# Altium PCB CSI2-TX2-XAVIER_Rev01.PcbDoc (part 1 of 2)
Units mm, origin at the board's own origin, x right, y up, seen from the top; angles counter-clockwise.
Board outline 75 x 25 mm, 4 copper layers (Layer1 Top, Layer2, Layer3, Layer4 Bottom), stack 1.62 mm thick; 77 components, 97 nets, 354 pads, 134 vias.
Unrouted connection lines stored in the file: 59.
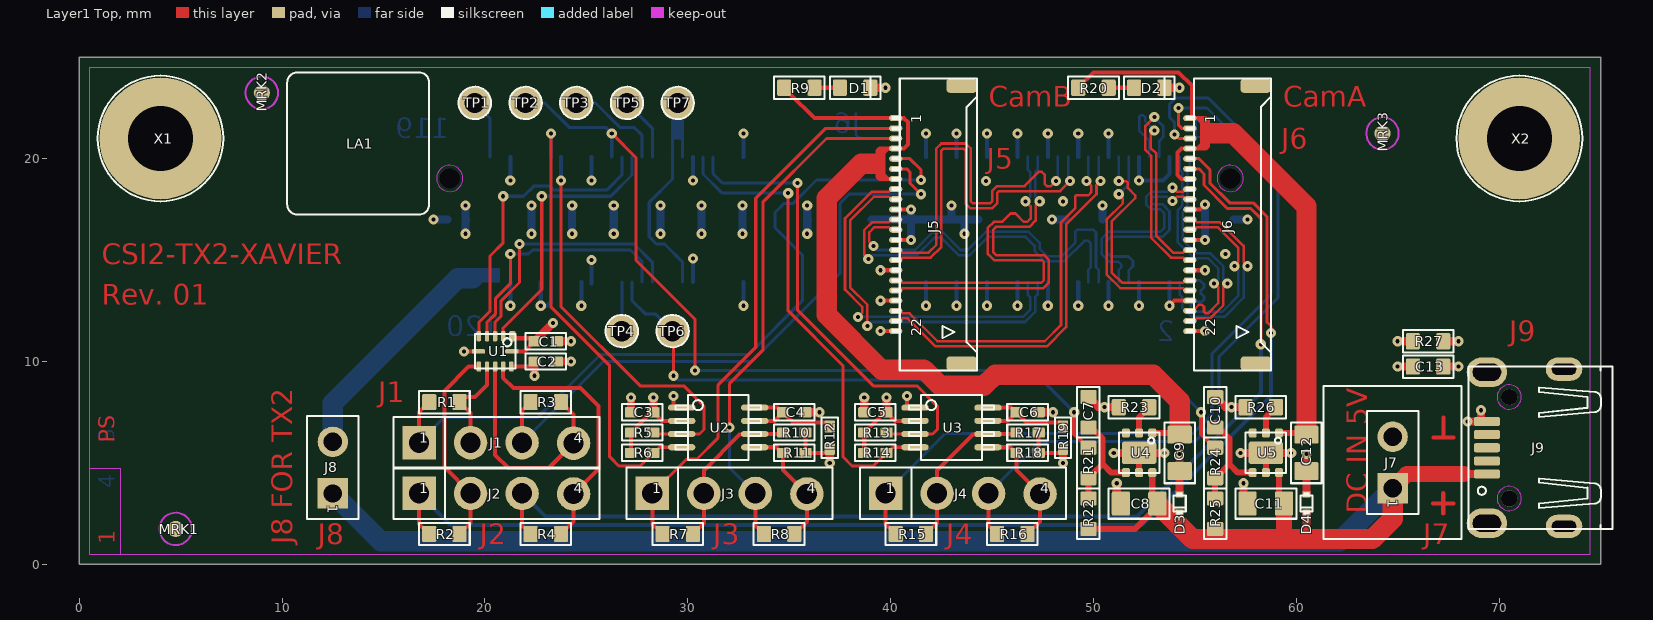
[diagram p0: Layer1 Top view]
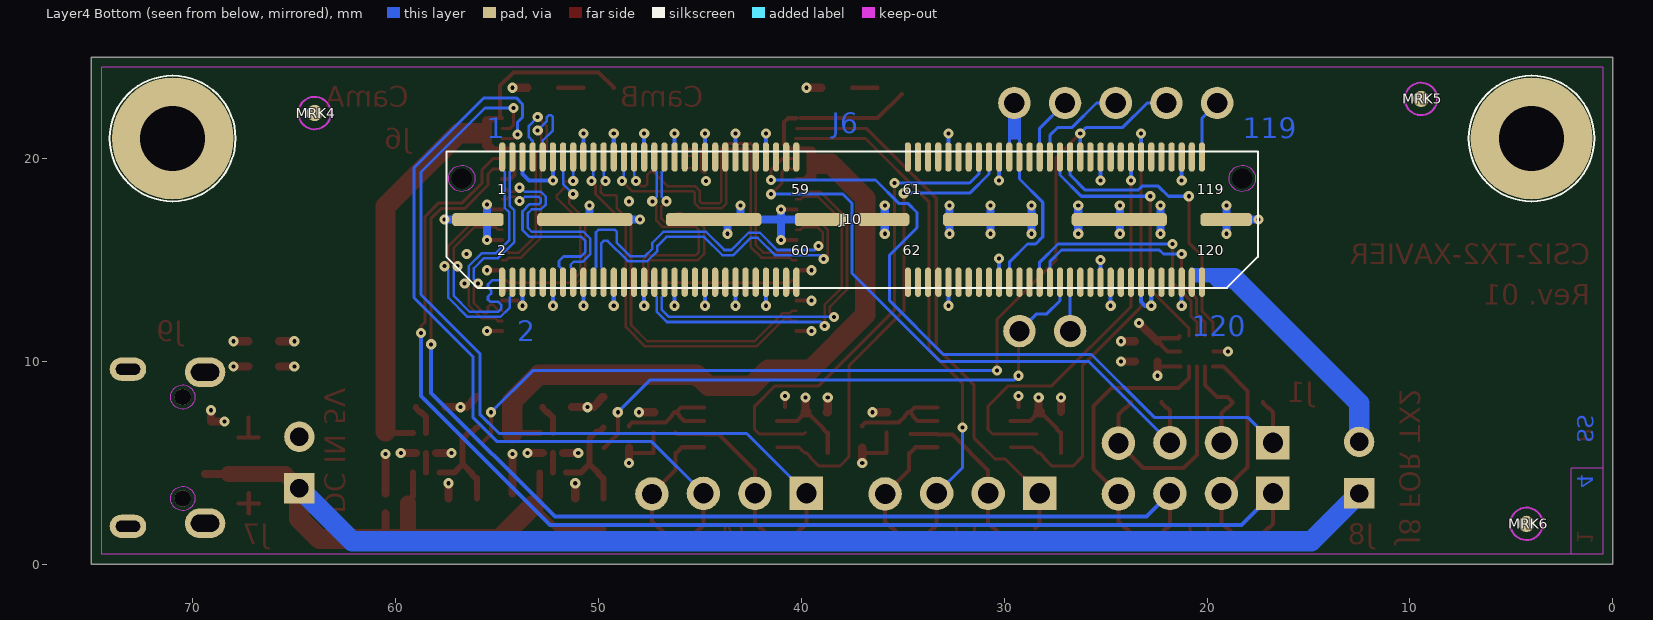
[diagram p1: Layer4 Bottom view, seen from below]
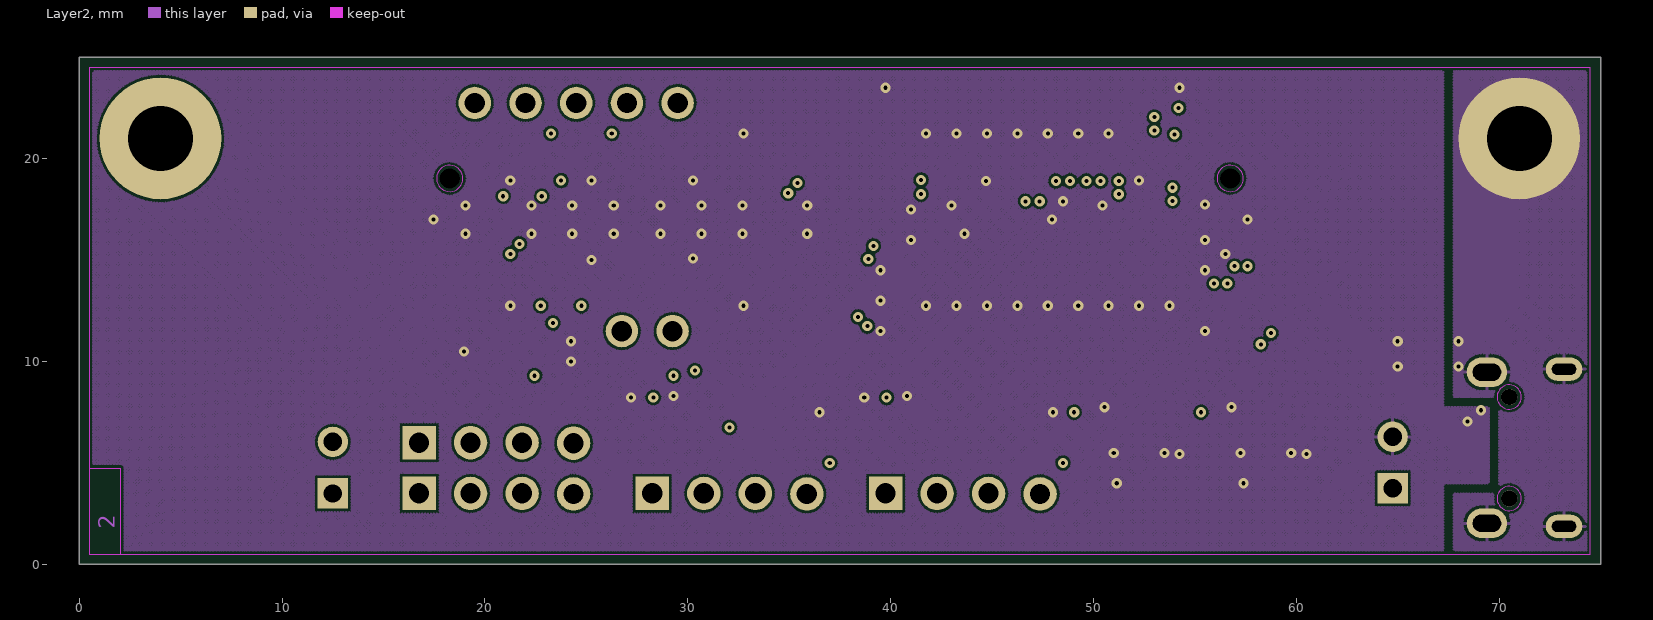
[diagram p2: Layer2]
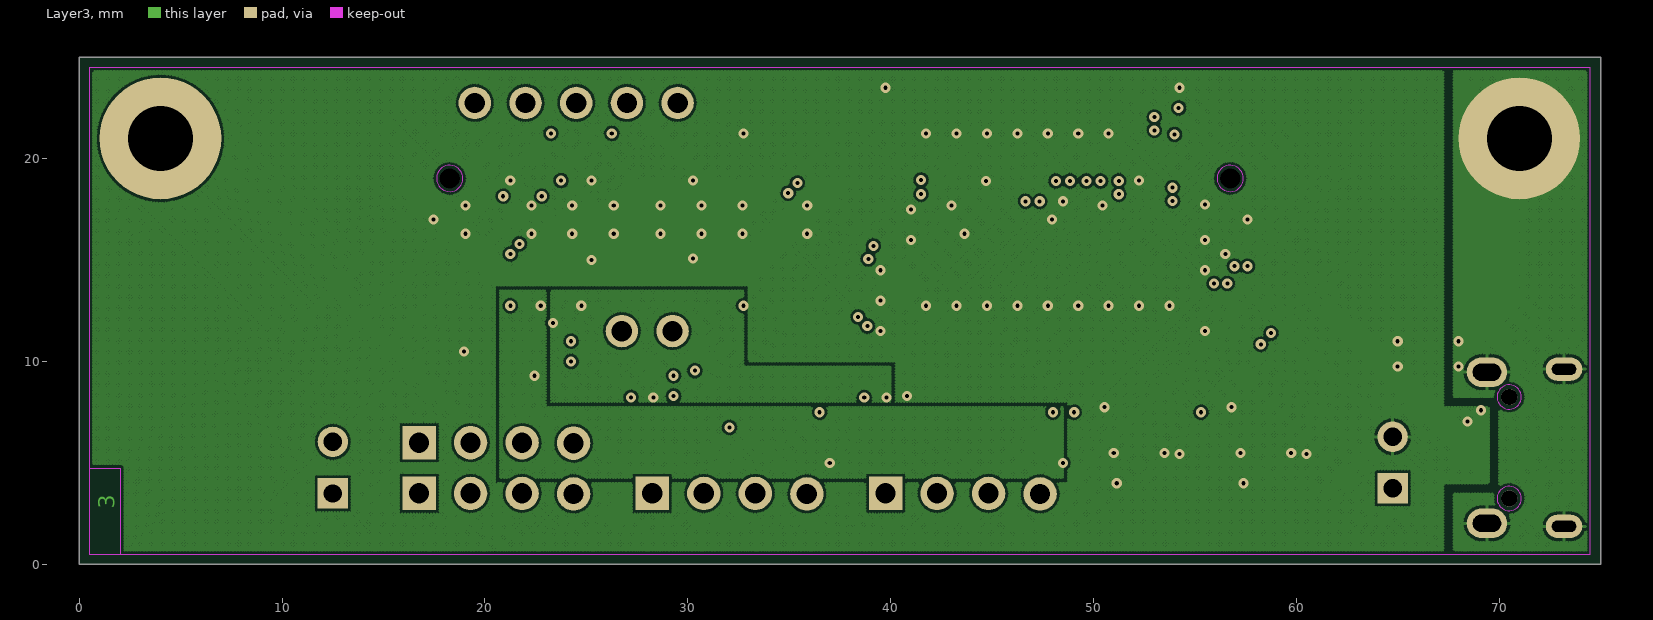
[diagram p3: Layer3]
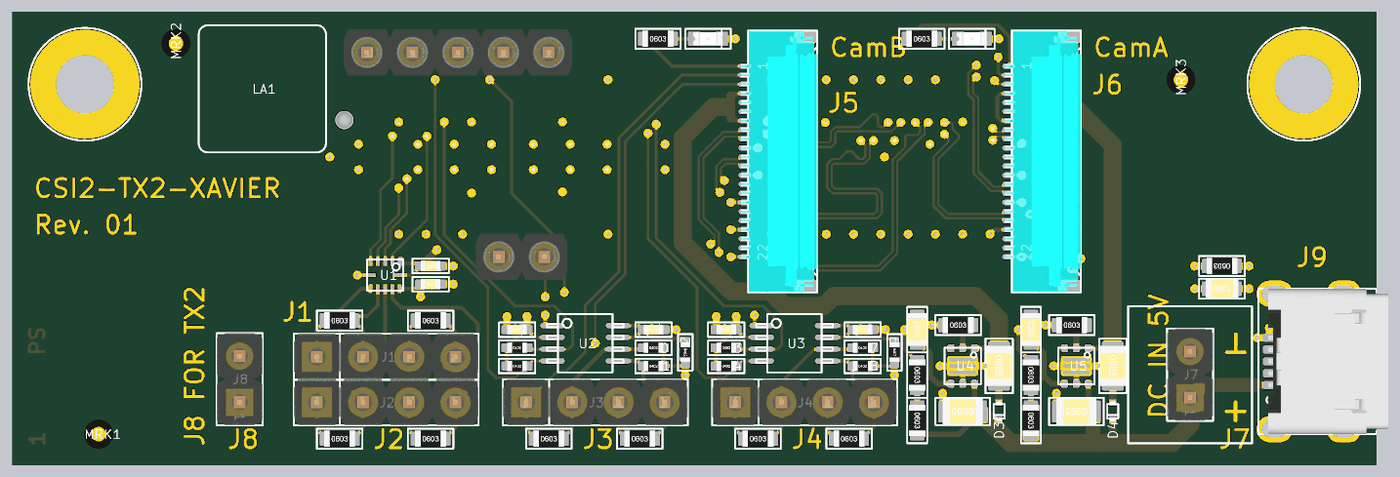
[diagram p5: 3D render of the assembled board from above, using the file's embedded part models]

## Layer stack, top to bottom
Top Solder: solder mask 0.025, Solder Resist, Dk 3.5
Layer1 Top: signal copper 0.035
Dielectric1: prepreg 0.14, PP-006, Dk 4.1
Layer2: signal copper 0.035
Dielectric2: core 1.2, Core-039, Dk 4.8
Layer3: signal copper 0.035
Dielectric3: prepreg 0.14, PP-006, Dk 4.1
Layer4 Bottom: signal copper 0.035
Bottom Solder: solder mask 0.025, Solder Resist, Dk 3.5

## Board outline
0,0 75,0 75,25 0,25

## Design rules (kind name [scope] priority, off if disabled: settings)
Clearance [All] p1: gap=0.125 ignorepadtopadclearanceinfootprint=FALSE
ComponentClearance [All] p1 off: gap=0.254 collisioncheckmode=3 verticalgap=0.254 showdistances=FALSE
DiffPairsRouting [All] p1: maxlimit=1 minlimit=0.125 mostfreqgap=0.125 toplayer_minwidth=0.125 toplayer_maxwidth=0.125 toplayer_prefwidth=0.125 midlayer1_minwidth=0.125 midlayer1_maxwidth=0.125 midlayer1_prefwidth=0.125 midlayer2_minwidth=0.125 midlayer2_maxwidth=0.125 midlayer2_prefwidth=0.125 bottomlayer_minwidth=0.125 bottomlayer_maxwidth=0.125 bottomlayer_prefwidth=0.125 maxuncoupledlength=12.7
FabricationTestPointUsage TestPointUsage [All] p1: valid=0 allowmultiple=FALSE
FabricationTestpoint Testpoint [All] p1: side=3 testpointundercomponent=TRUE minsize=1.016 maxsize=2.54 preferedsize=1.524 minholesize=0 maxholesize=1.016 preferedholesize=0.813 testpointgrid=0.025 allowsidetop=TRUE allowsidebottom=TRUE usegrid=TRUE gridtolerance=0
Height [All] p1 off: minheight=0 maxheight=25.4 prefheight=12.7
HoleSize [All] p1: absolutevalues=TRUE maxlimit=5 minlimit=0.025 maxpercent=80.000 minpercent=20.000
PlaneClearance [All] p1: clearance=0.3
PlaneConnect FreePads [(InPadClass('Free-Pads'))   or (isvia)] p1: planeconnectstyle=Direct reliefexpansion=0.508 reliefentries=4 reliefconductorwidth=0.254 reliefairgap=0.254
PlaneConnect [All] p2: planeconnectstyle=Relief reliefexpansion=0.2 reliefentries=4 reliefconductorwidth=0.2 reliefairgap=0.2
PolygonConnect VIA [isvia] p1: connectstyle=Direct reliefconductorwidth=0.2 reliefentries=4 polygonreliefangle="90 Angle" airgapwidth=0.254
PolygonConnect C-GND [HasFootprint('HOLE-3.2-6.0-DK')] p2: connectstyle=Direct reliefconductorwidth=0.2 reliefentries=4 polygonreliefangle="90 Angle" airgapwidth=0.254
PolygonConnect PolygonConnect_1 [All] p3: connectstyle=Relief reliefconductorwidth=0.15 reliefentries=4 polygonreliefangle="90 Angle" airgapwidth=0.15
RoutingVias [All] p1: holewidth=0.2 width=0.5 viastyle="Through Hole" minholewidth=0.2 minwidth=0.5 maxholewidth=0.2 maxwidth=0.5
SilkToSolderMaskClearance SilkscreenOverComponentPads [IsPad] p1: minsilkscreentomaskgap=0.254 clearancetoexposedcopper=TRUE
SolderMaskExpansion SolderMaskExpansion_VIA [(IsVia)] p1: expansion=-9
SolderMaskExpansion [All] p2: expansion=0.05
Width [All] p1: maxlimit=2 minlimit=0.1 preferedwidth=0.15
21 further rules are at their usual default settings.

## Classes and differential pairs
net class "100 Ohm": CSI0_CLK_N CSI0_CLK_P CSI0_D0_N CSI0_D0_P CSI0_D1_N CSI0_D1_P CSI1_D0_N CSI1_D0_P CSI1_D1_N CSI1_D1_P CSI2_CLK_N CSI2_CLK_P CSI2_D0_N CSI2_D0_P CSI2_D1_N CSI2_D1_P CSI3_D0_N CSI3_D0_P CSI3_D1_N CSI3_D1_P
differential pair CSI7_D1: +CSI7_D1_P -CSI7_D1_N
differential pair CSI7_D0: +CSI7_D0_P -CSI7_D0_N
differential pair CSI7_CLK: +CSI7_CLK_P -CSI7_CLK_N
differential pair CSI6_D1: +CSI6_D1_P -CSI6_D1_N
differential pair CSI6_D0: +CSI6_D0_P -CSI6_D0_N
differential pair CSI6_CLK: +CSI6_CLK_P -CSI6_CLK_N
differential pair CSI5_D1: +CSI5_D1_P -CSI5_D1_N
differential pair CSI5_D0: +CSI5_D0_P -CSI5_D0_N
differential pair CSI5_CLK: +CSI5_CLK_P -CSI5_CLK_N
differential pair CSI4_D1: +CSI4_D1_P -CSI4_D1_N
differential pair CSI4_D0: +CSI4_D0_P -CSI4_D0_N
differential pair CSI4_CLK: +CSI4_CLK_P -CSI4_CLK_N
differential pair CSI3_D1: +CSI3_D1_P -CSI3_D1_N
differential pair CSI3_D0: +CSI3_D0_P -CSI3_D0_N
differential pair CSI3_CLK: +CSI3_CLK_P -CSI3_CLK_N
differential pair CSI2_D1: +CSI2_D1_P -CSI2_D1_N
differential pair CSI2_D0: +CSI2_D0_P -CSI2_D0_N
differential pair CSI2_CLK: +CSI2_CLK_P -CSI2_CLK_N
differential pair CSI1_D1: +CSI1_D1_P -CSI1_D1_N
differential pair CSI1_D0: +CSI1_D0_P -CSI1_D0_N
differential pair CSI1_CLK: +CSI1_CLK_P -CSI1_CLK_N
differential pair CSI0_D1: +CSI0_D1_P -CSI0_D1_N
differential pair CSI0_D0: +CSI0_D0_P -CSI0_D0_N
differential pair CSI0_CLK: +CSI0_CLK_P -CSI0_CLK_N

## Components (designator, comment, footprint, x,y, rotation, side; value= is the part's Value field where it differs from the comment)
C1 "100n" C-0402_0.55 23,11 r0 top (schematic designator C11)
C2 "100n" C-0402_0.55 23,10 r0 top (schematic designator C12)
C3 "100n" C-0402_0.55 27.75,7.5 r180 top (schematic designator C9)
C4 "100p" C-0402_0.55 35.25,7.5 r0 top
C5 "100n" C-0402_0.55 39.25,7.5 r180 top (schematic designator C8)
C6 "100p" C-0402_0.55 46.75,7.5 r0 top (schematic designator C3)
C7 "100n" C-0603_1.0 49.75,7.5 r90 top (schematic designator C10)
C8 "10u" C-0805_1.4 52.25,3 r180 top (schematic designator C7)
C9 "10u" C-0805_1.4 54.25,5.5 r270 top (schematic designator C6)
C10 "100n" C-0603_1.0 56,7.5 r90 top (schematic designator C5)
C11 "10u" C-0805_1.4 58.5,3 r180 top (schematic designator C2)
C12 "10u" C-0805_1.4 60.5,5.5 r270 top (schematic designator C1)
C13 "NL" C-0603_1.0 66.5,9.75 r0 top
D1 "GREEN" D-0603-LED 38.25,23.5 r180 top (schematic designator D4)
D2 "GREEN" D-0603-LED 52.75,23.5 r180 top
D3 "ESD9B5.0ST5G" D-SOD923 54.25,3 r270 top
D4 "ESD9B5.0ST5G" D-SOD923 60.5,3 r270 top (schematic designator D1)
J1 "CON1x4" "CON 1x4 RM2.54" 16.75,6 r0 top (schematic designator J7)
J2 "CON1x4" "CON 1x4 RM2.54" 16.75,3.5 r0 top (schematic designator J5)
J3 "CON1x4" "CON 1x4 RM2.54" 28.25,3.5 r0 top (schematic designator J6)
J4 "CON1x4" "CON 1x4 RM2.54" 39.75,3.5 r0 top
J5 "CON FFC22_Inverted" "J-FH55-22S-0.5SH - Inverted Pins" 40.25,16.75 r90 top locked (schematic designator J11)
J6 "CON FFC22_Inverted" "J-FH55-22S-0.5SH - Inverted Pins" 54.75,16.75 r90 top locked (schematic designator J32)
J7 "CON1x2" "CON 1x2 RM2.54" 64.75,3.75 r90 top (schematic designator J2)
J8 "CON1x2" "CON 1x2 RM2.54" 12.5,3.5 r90 top (schematic designator J3)
J9 "USB 2.0 Typ B 90°" J-629105150521 69.4,5.75 r90 top (schematic designator J1)
J10 "QTH-060-01-L-D-A" J-QTH-060-XX-X-D-A 37.5,17 r180 bottom locked (schematic designator J40)
LA1 "LABEL 7x7mm" "PCB LABEL 7x7" 13.75,20.75 r180 top
MRK1 "Marker Single Layer" PCB_MARKER_PAD_TOP 4.75,1.75 r0 top (schematic designator MRK3)
MRK2 "Marker Single Layer" PCB_MARKER_PAD_TOP 9,23.25 r90 top (schematic designator MRK1)
MRK3 "Marker Single Layer" PCB_MARKER_PAD_TOP 64.25,21.25 r0 top (schematic designator MRK2)
MRK4 "Marker Single Layer" PCB_Marker_Pad_top 64,22.25 r0 bottom (schematic designator MRK5)
MRK5 "Marker Single Layer" PCB_MARKER_PAD_TOP 9.45,22.95 r180 bottom (schematic designator MRK4)
MRK6 "Marker Single Layer" PCB_Marker_Pad_top 4.25,2 r0 bottom
R1 "0R0" R-0603_0.6 18,8 r0 top (schematic designator R22)
R2 "0R0" R-0603_0.6 18,1.5 r0 top (schematic designator R18)
R3 "0R0" R-0603_0.6 23,8 r0 top (schematic designator R21)
R4 "0R0" R-0603_0.6 23,1.5 r0 top (schematic designator R17)
R5 "2k0" R-0402_0.4 27.75,6.5 r0 top (schematic designator R40)
R6 "2k0" R-0402_0.4 27.75,5.5 r0 top (schematic designator R39)
R7 "0R0" R-0603_0.6 29.5,1.5 r0 top (schematic designator R20)
R8 "0R0" R-0603_0.6 34.5,1.5 r0 top (schematic designator R19)
R9 "3k3" R-0603_0.6 35.5,23.5 r0 top (schematic designator R5)
R10 "2k0" R-0402_0.4 35.25,6.5 r0 top (schematic designator R13)
R11 "2k0" R-0402_0.4 35.25,5.5 r0 top (schematic designator R12)
R12 "200k" R-0402_0.4 37,6.25 r270 top (schematic designator R14)
R13 "2k0" R-0402_0.4 39.25,6.5 r0 top (schematic designator R38)
R14 "2k0" R-0402_0.4 39.25,5.5 r0 top (schematic designator R37)
R15 "0R0" R-0603_0.6 41,1.5 r0 top (schematic designator R16)
R16 "0R0" R-0603_0.6 46,1.5 r0 top (schematic designator R15)
R17 "2k0" R-0402_0.4 46.75,6.5 r0 top (schematic designator R10)
R18 "2k0" R-0402_0.4 46.75,5.5 r0 top (schematic designator R9)
R19 "200k" R-0402_0.4 48.5,6.25 r270 top (schematic designator R11)
R20 "3k3" R-0603_0.6 50,23.5 r0 top (schematic designator R1)
R21 "NL" R-0603_0.6 49.75,5 r270 top (schematic designator R8)
R22 "270k" R-0603_0.6 49.75,2.5 r270 top (schematic designator R6)
R23 "51k" R-0603_0.6 52,7.75 r0 top (schematic designator R7)
R24 "NL" R-0603_0.6 56,5 r270 top (schematic designator R4)
R25 "270k" R-0603_0.6 56,2.5 r270 top (schematic designator R2)
R26 "51k" R-0603_0.6 58.25,7.75 r0 top (schematic designator R3)
R27 "0R0" R-0603_0.6 66.5,11 r180 top (schematic designator R23)
T1 "PCB Text TOP" "PCB TEXTFIELD TOP 2" 5,-24 r0 top locked
T2 "PCB Text BOT" "PCB TEXTFIELD BOT 2" 5,-24 r180 bottom locked
TP1 "TP" TP_16_10 19.5,22.75 r180 top (schematic designator TP5)
TP2 "TP" TP_16_10 22,22.75 r180 top
TP3 "TP" TP_16_10 24.5,22.75 r180 top (schematic designator TP7)
TP4 "TP" TP_16_10 26.75,11.5 r180 top
TP5 "TP" TP_16_10 27,22.75 r180 top (schematic designator TP6)
TP6 "TP" TP_16_10 29.25,11.5 r180 top (schematic designator TP3)
TP7 "TP" TP_16_10 29.5,22.75 r180 top (schematic designator TP1)
U1 "NTB0104GU12,115" IC-XQFN12_1.7x2x0.5 20.5,10.5 r270 top (schematic designator U5)
U2 "PCA9306DCTR" IC-TSSOP8_3.15x4.25x1.3 31.5,6.75 r0 top (schematic designator U4)
U3 "PCA9306DCTR" IC-TSSOP8_3.15x4.25x1.3 43,6.75 r0 top
U4 "TPS25200DRVT" IC-DFN06_2.0x2.0x0.8 52.25,5.5 r180 top (schematic designator U2)
U5 "TPS25200DRVT" IC-DFN06_2.0x2.0x0.8 58.5,5.5 r180 top (schematic designator U1)
X1 "Hole" HOLE-3.2-6.0-DK 4,21 r0 top
X2 "Hole" HOLE-3.2-6.0-DK 71,21 r0 top

## Footprints (in the part's own frame and the unit in brackets; to place one, negate y for a bottom-side part, rotate by r counter-clockwise, add the part's x,y. Pads: shape width x height; smd on the part's side, far side on the other; paste and mask are expansions set on the pad)
C-0402_0.55 [mm]
  rrect20% 0.6x0.5 smd: 1(-0.55,0) 2(0.55,0)
  silkscreen extent -1,-0.4 1,0.4, body extent -0.53,-0.27 0.54,0.28, height 0.55
C-0603_1.0 [mm]
  rrect20% 0.7x0.8 smd: 1(-0.75,0) 2(0.75,0)
  silkscreen extent -1.25,-0.55 1.25,0.55, body extent -0.9,-0.5 0.9,0.5, height 0.99
C-0805_1.4 [mm]
  rrect20% 0.9x1.2 smd: 1(-0.9,0) 2(0.9,0)
  silkscreen extent -1.5,-0.75 1.5,0.75, body extent -1.1,-0.7 1.1,0.7, height 1.4
"CON 1x2 RM2.54" [mm]
  rect 1.5x1.5 hole 0.9: 1(0,0)
  round 1.5 hole 0.9: 2(2.54,0)
  silkscreen extent -1.27,-1.27 3.81,1.27, body extent -1.26,-1.27 3.82,1.27, height 8.57
"CON 1x4 RM2.54" [mm] "RM2.54 Connector 1x4"
  rect 1.65x1.65 hole 1: 1(0,0)
  round 1.65 hole 1: 2(2.54,0) 3(5.08,0) 4(7.62,-0.025)
  silkscreen extent -1.27,-1.27 8.89,1.27, body extent -1.28,-1.26 8.88,1.28, height 8.57
D-0603-LED [mm] "Osram Chip LED 0603"
  rrect20% 0.7x0.8 smd: A(0.75,0) K(-0.75,0)
  silkscreen extent -1.25,-0.55 1.25,0.55, body extent -0.82,-0.36 0.83,0.36, height 0.67
D-SOD923 [mm]
  rrect20% 0.3x0.4 smd: A(-0.45,0) K(0.45,0)
  silkscreen extent -0.5,-0.3 0.5,0.3, body extent -0.4,-0.3 0.4,0.3, height 0.4
HOLE-3.2-6.0-DK [mm]
  round 6 hole 3.2: 1(0,0)
  silkscreen extent -3.1,-3.1 3.1,3.1
IC-DFN06_2.0x2.0x0.8 [mm]
  rrect50% 0.4x0.45 smd paste-0.02: 1(-0.65,-0.975) 2(0,-0.975) 3(0.65,-0.975) 4(0.65,0.975) 5(0,0.975) 6(-0.65,0.975)
  rrect20% 1.7x1.1 smd paste-9: 7(0,0)
  silkscreen extent -1,-1 1,1, body extent -1,-1 1,1, height 0.85
IC-TSSOP8_3.15x4.25x1.3 [mm]
  oval 1.35x0.3 smd: 1(-1.8,0.975) 2(-1.8,0.325) 3(-1.8,-0.325) 4(-1.8,-0.975) 5(1.8,-0.975) 6(1.8,-0.325) 7(1.8,0.325) 8(1.8,0.975)
  silkscreen extent -2.1,-1.6 2.1,1.6, body extent -1.5,-1.6 1.5,1.6, height 1.35
IC-XQFN12_1.7x2x0.5 [mm]
  rrect50% 0.5x0.32 smd paste-0.025 mask+0.05: 1(-0.75,0.85)
  rrect50% 0.5x0.22 smd paste-0.025 mask+0.05: 2(-0.75,0.4) 3(-0.75,0) 4(-0.75,-0.4) 5(-0.75,-0.8) 7(0.75,-0.8) 8(0.75,-0.4) 9(0.75,0) 10(0.75,0.4) 11(0.75,0.8)
  rrect50% 0.22x0.65 smd paste-0.02 mask+0.05: 6(0,-0.825)
  rrect50% 0.22x0.65 smd paste-0.025 mask+0.05: 12(0,0.825)
  silkscreen extent -0.85,-1 0.85,1
J-629105150521 [mm]
  rrect50% 0.45x1.3 smd: 1(-1.3,0) 2(-0.65,0) 3(0,0) 4(0.65,0) 5(1.3,0)
  oval 1.15x1.8 hole 0.55 slot 1.2 at 90 deg: 6(-3.875,-3.8) 9(3.875,-3.8)
  oval 1.45x2 hole 0.85 slot 1.4 at 90 deg: 7(-3.725,0) 8(3.725,0)
  round 0.8 hole 0.8 unplated: ""(-2.5,-1.1) ""(2.5,-1.1)
  Keep-Out Layer circle w0.025: c2.5,-1.1 r0.6
  Keep-Out Layer circle w0.025: c-2.5,-1.1 r0.6
  silkscreen extent -4,-6.2 4,0.9, body extent -4,-6.25 4,0.35, height 2.67
"J-FH55-22S-0.5SH - Inverted Pins" [mm]
  oval 0.3x0.65 smd: 1(5.25,0) 2(4.75,0) 3(4.25,0) 4(3.75,0) 5(3.25,0) 6(2.75,0) 7(2.25,0) 8(1.75,0) 9(1.25,0) 10(0.75,0) 11(0.25,0) 12(-0.25,0) 13(-0.75,0) 14(-1.25,0) 15(-1.75,0) 16(-2.25,0) 17(-2.75,0) 18(-3.25,0) 19(-3.75,0) 20(-4.25,0) 21(-4.75,0) 22(-5.25,0)
  rrect50% 0.7x1.5 smd: 23(-6.85,-3.25) 24(6.85,-3.25)
  silkscreen extent -7.2,-4 7.2,0.15, body extent -7.2,-4.05 7.2,0.2, height 1.46
J-QTH-060-XX-X-D-A [mm]
  oval 0.305x1.45 smd mask+0.05: 1(-17.25,3.086) 2(-17.25,-3.086) 3(-16.75,3.086) 4(-16.75,-3.086) 5(-16.25,3.086) 6(-16.25,-3.086) 7(-15.75,3.086) 8(-15.75,-3.086) 9(-15.25,3.086) 10(-15.25,-3.086) 11(-14.75,3.086) 12(-14.75,-3.086) 13(-14.25,3.086) 14(-14.25,-3.086) 15(-13.75,3.086) 16(-13.75,-3.086) 17(-13.25,3.086) 18(-13.25,-3.086) 19(-12.75,3.086) 20(-12.75,-3.086) 21(-12.25,3.086) 22(-12.25,-3.086) 23(-11.75,3.086) 24(-11.75,-3.086) 25(-11.25,3.086) 26(-11.25,-3.086) 27(-10.75,3.086) 28(-10.75,-3.086) 29(-10.25,3.086) 30(-10.25,-3.086) 31(-9.75,3.086) 32(-9.75,-3.086) 33(-9.25,3.086) 34(-9.25,-3.086) 35(-8.75,3.086) 36(-8.75,-3.086) 37(-8.25,3.086) 38(-8.25,-3.086) 39(-7.75,3.086) 40(-7.75,-3.086) 41(-7.25,3.086) 42(-7.25,-3.086) 43(-6.75,3.086) 44(-6.75,-3.086) 45(-6.25,3.086) 46(-6.25,-3.086) 47(-5.75,3.086) 48(-5.75,-3.086) 49(-5.25,3.086) 50(-5.25,-3.086) 51(-4.75,3.086) 52(-4.75,-3.086) 53(-4.25,3.086) 54(-4.25,-3.086) 55(-3.75,3.086) 56(-3.75,-3.086) 57(-3.25,3.086) 58(-3.25,-3.086) 59(-2.75,3.086) 60(-2.75,-3.086) 61(2.75,3.086) 62(2.75,-3.086) 63(3.25,3.086) 64(3.25,-3.086) 65(3.75,3.086) 66(3.75,-3.086) 67(4.25,3.086) 68(4.25,-3.086) 69(4.75,3.086) 70(4.75,-3.086) 71(5.25,3.086) 72(5.25,-3.086) 73(5.75,3.086) 74(5.75,-3.086) 75(6.25,3.086) 76(6.25,-3.086) 77(6.75,3.086) 78(6.75,-3.086) 79(7.25,3.086) 80(7.25,-3.086) 81(7.75,3.086) 82(7.75,-3.086) 83(8.25,3.086) 84(8.25,-3.086) 85(8.75,3.086) 86(8.75,-3.086) 87(9.25,3.086) 88(9.25,-3.086) 89(9.75,3.086) 90(9.75,-3.086) 91(10.25,3.086) 92(10.25,-3.086) 93(10.75,3.086) 94(10.75,-3.086) 95(11.25,3.086) 96(11.25,-3.086) 97(11.75,3.086) 98(11.75,-3.086) 99(12.25,3.086) 100(12.25,-3.086) 101(12.75,3.086) 102(12.75,-3.086) 103(13.25,3.086) 104(13.25,-3.086) 105(13.75,3.086) 106(13.75,-3.086) 107(14.25,3.086) 108(14.25,-3.086) 109(14.75,3.086) 110(14.75,-3.086) 111(15.25,3.086) 112(15.25,-3.086) 113(15.75,3.086) 114(15.75,-3.086) 115(16.25,3.086) 116(16.25,-3.086) 117(16.75,3.086) 118(16.75,-3.086) 119(17.25,3.086) 120(17.25,-3.086)
  rrect50% 2.54x0.64 smd mask+0.05: 121(-18.445,0) 124(-1.555,0) 125(1.555,0) 128(18.445,0)
  rrect50% 4.7x0.64 smd mask+0.05: 122(-13.175,0) 123(-6.825,0) 126(6.825,0) 127(13.175,0)
  round 0 hole 1 unplated mask+0.55: 129(-19.24,2.03) 130(19.24,2.03)
  Keep-Out Layer circle w0.025: c19.24,2.03 r0.65
  Keep-Out Layer circle w0.025: c-19.24,2.03 r0.65
  silkscreen extent -20,-3.36 20,3.36, body extent -20,-3.56 20,3.56, height 4.31
"PCB LABEL 7x7" [mm]
  silkscreen extent -3.5,-3.5 3.5,3.5, body extent -3.5,-3.5 3.5,3.5, height 0.1
"PCB TEXTFIELD BOT 2" [mm]
"PCB TEXTFIELD TOP 2" [mm]
PCB_MARKER_PAD_TOP [mm] "PCB Marker with Pad for X-/Y-Coordinates (Single Layer)"
  round 0.8 smd paste-999 mask+0.4: 1(0,0)
  Layer1 Top keep-out circle w0.1: c0,0 r0.8
PCB_Marker_Pad_top [mm] "PCB Marker with Pad for X-/Y-Coordinates (Single Layer)"
  round 0.8 smd paste-999 mask+0.4: 1(0,0)
  Layer1 Top keep-out circle w0.1: c0,0 r0.8
R-0402_0.4 [mm]
  rrect20% 0.6x0.5 smd: 1(-0.55,0) 2(0.55,0)
  silkscreen extent -1,-0.4 1,0.4, body extent -0.53,-0.27 0.54,0.28, height 0.39
R-0603_0.6 [mm]
  rrect20% 0.7x0.8 smd: 1(-0.75,0) 2(0.75,0)
  silkscreen extent -1.25,-0.55 1.25,0.55, body extent -0.85,-0.45 0.85,0.45, height 0.59
TP_16_10 [mm] "Testpoint: Pad=1,6mm; Hole=1,0mm"
  round 1.6 hole 1: 1(0,0)
  silkscreen extent -0.8,-0.8 0.8,0.8, body extent -1.27,-1.27 1.27,1.27, height 8.57

## Part data
C1 C2 C3 C5: library part "C 100N 10% 16V X7R 402", "Capacitor Ceramic SMD/0402/16V/X7R/10%", Dielectric=X7R, KHK Part Number=K8340114, Manufacturer=several, Tolerance=10%, Voltage=16V, Manufacturer Part Number=several
C4 C6: library part "C 100P 50V X7R 0402", "Capacitor Ceramic SMD/0402/50V/X7R/10%", Dielectric=X7R, KHK Part Number=K8340145, Manufacturer=several, Tolerance=10%, Voltage=50V, Manufacturer Part Number=several
C7 C10: library part "C 100N 50V X7R 0603", "Capacitor Ceramic SMD/0603/50V/X7R/10%", Dielectric=X7R, KHK Part Number=K8340023, Manufacturer=several, Tolerance=10%, Voltage=50V, Manufacturer Part Number=several
C8 C9 C11 C12: library part "C 10U 16V X5R 0805", "Capacitor Ceramic SMD/0805/16V/X5R/10%", Dielectric=X5R, KHK Part Number=K8340151, Manufacturer=several, Tolerance=10%, Voltage=16V, Manufacturer Part Number=several
C13: library part "C X 0603", "Capacitor Ceramic SMD/0603/50V/X7R/10%", Dielectric=X7R, Manufacturer=several, Tolerance=10%, Voltage=50V, Manufacturer Part Number=several
D1 D2: library part "D LED 0603 green", "Chip LED green 430mcd", Color=green, Current=20mA, KHK Part Number=8172, Manufacturer=Würth, Manufacturer Part Number=150060GS75000
D3 D4: library part "D ESD9B5.0ST5G", "DIODE TVS; 400W; 5.8-7.8V; BIDIRECT", KHK Part Number=7250, Manufacturer="ON Semiconductor", Manufacturer Part Number=ESD9B5.0ST5G
J1 J2 J3 J4: library part "CON 1x4 2.54", "Stiftleiste; 1x4; 2.54mm; gerade", KHK Part Number=K7600564, Manufacturer=Harwin, Manufacturer Part Number="M20-999 0445"
J5 J6: library part "CON FFC22_FH55-22S-0.5SH_Inverted", "FFC Connector 0.5mm shielded", KHK Part Number=10357, Manufacturer=Hirose, Manufacturer Part Number=FH55-22S-0.5SH
J7 J8: library part "CON 1x2 2.54", "Stiftleiste; 1x2; 2.54mm; gerade", KHK Part Number=K7600582, Manufacturer="fischer elektronik", Manufacturer Part Number="SL 11 124 2 G"
J9: library part "CON USB 2.0 Typ B 90°", "Micro USB 2.0 Typ B 90°", KHK Part Number=14360, Manufacturer=WE, Manufacturer Part Number="629 105 150 521"
J10: library part "CON QTH-060-01-L-D-A", "120pin B2B Header 0.5 pitch 10.27mm Height", KHK Part Number=10657, Manufacturer=SamTec, Manufacturer Part Number=QTH-060-01-L-D-A
LA1: library part "PCB LABEL 7x7", Manufacturer=several, Manufacturer Part Number=several
MRK1 MRK2 MRK3 MRK4 MRK5 MRK6: library part "PCB Marker Pad Single Layer", "Position Marker for PCBs"
R1 R2 R3 R4 R27: library part "R 0R0 1% 0603", "Standard Resistor SMD/0603/1%/100mW/TK200", KHK Part Number=K8250041, Manufacturer=several, Tolerance=1%, Manufacturer Part Number=several
R5 R6 R10 R11 R13 R14 R17 R18: library part "R 2k0 1% 0402", "Standard Resistor SMD/0402/1%/63mW/TK100", KHK Part Number=K8250311, Manufacturer=several, Temperature Coefficient=TK100, Tolerance=1%, Manufacturer Part Number=several
R7 R8 R15 R16: library part "R 0R0 1% 0603", "Standard Resistor SMD/0603/1%/100mW/TK100", KHK Part Number=K8250041, Manufacturer=several, Tolerance=1%, Manufacturer Part Number=several
R9 R20: library part "R 3K3 1% 0603", "Standard Resistor SMD/0603/1%/100mW/TK100", KHK Part Number=K8250070, Manufacturer=several, Tolerance=1%, Manufacturer Part Number=several
R12 R19: library part "R 200K 1% 0402", "Standard Resistor SMD/0402/1%/63mW/TK100", KHK Part Number=K8250280, Manufacturer=several, Temperature Coefficient=TK100, Tolerance=1%, Manufacturer Part Number=several
R21 R24: library part "R X 0603", "Standard Resistor SMD/0603/1%/100mW/TK200", Temperature Coefficient=TK100, Tolerance=1%
R22 R25: library part "R 270K 1% 0603", "Standard Resistor SMD/0603/1%/100mW/TK100", KHK Part Number=K8250170, Manufacturer=several, Temperature Coefficient=na, Tolerance=1%, Manufacturer Part Number=several
R23 R26: library part "R 51K 1% 0603", "Standard Resistor SMD/0603/1%/100mW/TK100", KHK Part Number=K8250156, Manufacturer=several, Tolerance=1%, Manufacturer Part Number=several
T1: library part "PCB TEXT FIELD TOP", "PCB Textfield TOP"
T2: library part "PCB TEXT FIELD BOT", "PCB Textfield BOT"
TP1 TP2 TP3 TP4 TP5 TP6 TP7: library part TP_16_10, "Testpoint: Pad=1,6mm; Hole=1,0mm"
U1: library part "IC NTB0104GU12,115", "IC/LOGIC/Levelshifter;Auto-Dir;Bidirectional;Push-Pull;-40-+125°C/", KHK Part Number=14383, Manufacturer=NXP, Manufacturer Part Number=NTB0104GU12,115
U2 U3: library part "IC PCA9306DCTR", "IC/LOGIC/LEVELSHIFTER;I2C;AUTO-DIR;1V2-5V/SSOP-8/4.25x3.15x1.3mm", KHK Part Number=9555, Manufacturer=TI, Manufacturer Part Number=PCA9306DCTR
U4 U5: library part "IC  TPS25200DRVT", "IC/PWR/LOADSW;2V5-6V5;2A5;0R099/6-WDFN/2x2x0.8mm", KHK Part Number=14277, Manufacturer="Texas Instruments", I max=2.5A, Manufacturer Part Number=TPS25200DRVT, Vin=2.5V-6.5V
X1 X2: library part "PCB HOLE M3-6-DK", "HOLE M3"

## Via types
v1: diameter 0.5, hole 0.2, Layer1 Top to Layer4 Bottom, 134 vias

## Nets (pads, with @x,y where several pads share a name; then routed paths per layer and width w, separated by ;. In a path a pad name is that pad's centre, name@x,y a point inside that pad or via, vN(x,y) a via of type N, cw(c..) or ccw(c..) an arc to the next point about the centre after c; other vN are vias at no path point)
C-GND: C13.2 J9.6 J9.7 J9.8 J9.9 R27.1 X2.1 | length 1.5
  Layer1 Top w0.4: C13.2@67.25,9.75 v1(68,9.75) ; R27.1@67.25,11 v1(68,11)
CAM0_MCLK02: J10.91 U1.2 | length 13.5
  Layer1 Top w0.15: U1.2@20.9,11.25 20.9,11.65 22.8,13.55 v1(22.8,18.15)
  Layer4 Bottom w0.15: v1(22.8,18.15) 26.2,18.15 27.25,19.2 J10.91@27.25,20.086
CAM0_MCLK02_3V3: J2.4 R4.2 U1.10 | length 12.9
  Layer1 Top w0.2: U1.10@20.9,9.75 20.9,9.2 21.4,8.7 24.7,8.7 25.6,7.8 25.6,4.705 J2.4@24.37,3.475 24.37,2.12 24.05,1.8 24,1.8 23.75,1.55 R4.2@23.75,1.5
CAM0_PWDN: J10.93 U1.5 | length 14.7
  Layer1 Top w0.15: U1.5@19.7,11.25 19.7,11.928 20.25,12.478 20.25,15.2 20.9,15.85 v1(20.9,18.15)
  Layer4 Bottom w0.15: v1(20.9,18.15) 21.9,18.15 22.4,18.65 23.2,18.65 23.4,18.45 26,18.45 26.75,19.2 J10.93@26.75,20.086
CAM0_PWDN_3V3: J2.2 R2.2 U1.7 | length 10
  Layer1 Top w0.2: R2.2@18.75,1.5 18.75,1.55 19,1.8 19.05,1.8 19.29,2.04 J2.2@19.29,3.5 18,4.79 18,8.55 19.2,9.75 U1.7@19.7,9.75
CAM0_RST: J10.95 R24.1 TP2.1 | length 47.1
  Layer1 Top w0.15: v1(26.25,21.25) 27.45,20.05 27.45,15 30.35,12.1 v1(30.35,9.55)
  Layer1 Top w0.2: v1(55.3,7.5) 55.3,6.423 R24.1@55.7,6.023
  Layer4 Bottom w0.15: TP2.1@22,22.75 22.95,22.75 24.15,21.55 25.95,21.55 v1(26.25,21.25) J10.95@26.25,20.086 ; v1@30.2,9.65 30.3,9.55 v1(30.35,9.55) 53.25,9.55 v1(55.3,7.5)
CAM1_MCLK03: J10.88 U1.3 | length 13
  Layer1 Top w0.15: U1.3@20.5,11.25 20.5,11.95 20.8,12.25 20.8,13 21.7,13.9 v1(21.7,15.8)
  Layer4 Bottom w0.15: v1(21.7,15.8) 27.35,15.8 28.25,14.9 J10.88@28.25,13.914
CAM1_MCLK03_3V3: J1.4 R3.2 U1.9 | length 11.3
  Layer1 Top w0.2: U1.9@20.5,9.75 20.5,5.4 21.15,4.75 23.145,4.75 J1.4@24.37,5.975 24.37,7.38 24.05,7.7 24,7.7 23.75,7.95 R3.2@23.75,8
CAM2_MCLK04: J10.94 TP4.1 | length 2.4
  Layer4 Bottom w0.15: TP4.1@26.75,11.5 J10.94@26.75,13.914
CSI0_CLK_N: J6.14 J10.9 | length 10.8
  Layer1 Top w0.125: v1(53,21.4) 52.814,21.214 52.814,20.536 53.1,20.25 53.1,16.2 53.925,15.375 54.414,15.375 54.539,15.5 J6.14@54.75,15.5
  Layer4 Bottom w0.125: J10.9@52.75,20.086 52.75,20.9 52.25,21.4 52.25,22.05 52.35,22.15 52.45,22.15 52.55,22.05 52.55,21.85 v1(53,21.4)
CSI0_CLK_P: J6.15 J10.7 | length 10.8
  Layer1 Top w0.125: v1(53,22.05) 52.563,21.613 52.562,20.438 52.564,20.436 52.564,20.432 52.85,20.146 52.85,16.096 53.821,15.125 54.414,15.125 54.539,15 J6.15@54.75,15
  Layer4 Bottom w0.125: v1(53,22.05) 53.438,21.612 53.437,21.069 53.25,20.881 J10.7@53.25,20.086
CSI0_D0_N: J6.20 J10.3 | length 10.8
  Layer1 Top w0.125: J6.20@54.75,12.5 54.902,12.5 55.202,12.8 55.35,12.8 55.45,12.7 55.45,12.45 55.525,12.375 55.65,12.375 56.15,12.875 56.15,13.65 v1(55.95,13.85)
  Layer4 Bottom w0.125: J10.3@54.25,20.086 54.25,19.475 54.375,19.35 54.375,18.481 54.375,17.675 54.15,17.45 54.15,15.896 54.946,15.1 55.65,15.1 56.15,14.6 56.15,14.05 v1(55.95,13.85)
CSI0_D0_P: J6.21 J10.1 | length 10.8
  Layer1 Top w0.125: J6.21@54.75,12 54.961,12 55.086,12.125 55.366,12.125 55.754,12.125 56.4,12.771 56.4,13.65 v1(56.6,13.85)
  Layer4 Bottom w0.125: J10.1@54.75,20.086 54.75,19.475 54.625,19.35 54.625,18.377 54.625,17.571 54.4,17.346 54.4,16 55.05,15.35 55.754,15.35 56.4,14.704 56.4,14.05 v1(56.6,13.85)
CSI0_D1_N: J6.17 J10.15 | length 10.8
  Layer1 Top w0.125: v1(51.25,18.9) 51.6,18.9 51.7,18.8 51.7,18.55 52.05,18.2 52.05,18.05 50.9,16.9 50.9,14.4 51.425,13.875 54.2,13.875 54.414,13.875 54.539,14 J6.17@54.75,14
  Layer4 Bottom w0.125: v1(51.25,18.9) J10.15@51.25,20.086
CSI0_D1_P: J6.18 J10.13 | length 10.8
  Layer1 Top w0.125: v1(51.25,18.25) 51.45,18.05 51.45,17.804 50.65,17.004 50.65,14.296 51.321,13.625 54.096,13.625 54.414,13.625 54.539,13.5 J6.18@54.75,13.5
  Layer4 Bottom w0.125: v1(51.25,18.25) 51.75,18.75 J10.13@51.75,20.086
CSI1_CLK_N: J10.10
CSI1_CLK_P: J10.8
CSI1_D0_N: J6.11 J10.4 | length 10.8
  Layer1 Top w0.125: J6.11@54.75,17 54.961,17 55.086,16.875 56.225,16.875 57.4,15.7 57.4,14.9 v1(57.6,14.7)
  Layer4 Bottom w0.125: J10.4@54.25,13.914 54.25,13.303 54.375,13.178 54.375,12.671 54.846,12.2 56.454,12.2 57.4,13.146 57.4,14.5 v1(57.6,14.7)
CSI1_D0_P: J6.12 J10.2 | length 10.8
  Layer1 Top w0.125: J6.12@54.75,16.5 54.961,16.5 55.086,16.625 56.121,16.625 57.15,15.596 57.15,14.9 v1(56.95,14.7)
  Layer4 Bottom w0.125: J10.2@54.75,13.914 54.75,14 55.25,14 55.45,13.8 55.45,13.65 55.3,13.5 55.3,13.35 55.45,13.2 55.45,13.05 55.338,12.938 54.937,12.938 54.8,12.8 54.8,12.6 54.95,12.45 56.35,12.45 57.15,13.25 57.15,14.5 v1(56.95,14.7)
CSI1_D1_N: J6.8 J10.16 | length 10.8
  Layer1 Top w0.125: v1(53.9,18.572) 54.097,18.375 54.414,18.375 54.539,18.5 J6.8@54.75,18.5
  Layer4 Bottom w0.125: J10.16@51.25,13.914 51.25,14.525 51.375,14.65 51.375,14.771 51.219,14.928 50.772,14.928 50.4,15.3 50.4,16.054 50.746,16.4 53.3,16.4 53.5,16.6 53.5,17.3 53.292,17.508 52.839,17.508 52.6,17.746 52.6,18.126 52.846,18.372 53.481,18.372 53.639,18.372 53.839,18.572 v1(53.9,18.572)
CSI1_D1_P: J6.9 J10.14 | length 10.8
  Layer1 Top w0.125: v1(53.9,17.922) 54.103,18.125 54.414,18.125 54.539,18 J6.9@54.75,18
  Layer4 Bottom w0.125: J10.14@51.75,13.914 51.75,14.5 51.95,14.7 51.95,14.95 51.721,15.179 50.874,15.179 50.65,15.404 50.65,15.95 50.85,16.15 53.404,16.15 53.75,16.496 53.75,17.404 53.396,17.758 52.942,17.758 52.85,17.85 52.85,18.022 52.95,18.122 53.378,18.122 53.639,18.122 53.839,17.922 v1(53.9,17.922)
CSI2_CLK_N: J5.14 J10.27 | length 18.5
  Layer1 Top w0.125: J5.14@40.25,15.5 40.461,15.5 40.586,15.375 41.063,15.375 41.871,15.375 42.25,15.754 42.25,20.5 42.5,20.75 43.704,20.75 43.95,20.504 43.95,17.9 44.05,17.8 44.9,17.8 45,17.9 45,18.404 45.246,18.65 46.6,18.65 47.3,19.35 47.45,19.35 47.587,19.213 47.587,18.763 47.7,18.65 47.9,18.65 v1(48.15,18.9)
  Layer4 Bottom w0.125: v1@48.25,18.922 J10.27@48.25,20.086
CSI2_CLK_P: J5.15 J10.25 | length 18.4
  Layer1 Top w0.125: J5.15@40.25,15 40.461,15 40.586,15.125 41.166,15.125 41.975,15.125 42.5,15.65 42.5,20.396 42.604,20.5 43.6,20.5 43.7,20.4 43.7,17.796 43.946,17.55 45.004,17.55 45.25,17.796 45.25,18.3 45.35,18.4 48.35,18.4 v1(48.85,18.9)
  Layer4 Bottom w0.125: v1@48.75,18.922 J10.25@48.75,20.086
CSI2_D0_N: J5.20 J10.21 | length 18.4
  Layer1 Top w0.125: J5.20@40.25,12.5 40.461,12.5 40.586,12.375 40.936,12.375 42.311,11 47.6,11 48.4,11.8 48.4,16.854 49.1,17.554 49.1,18.15 49.15,18.2 49.746,18.2 49.9,18.354 49.9,18.65 v1(49.65,18.9)
  Layer4 Bottom w0.125: v1@49.75,18.922 J10.21@49.75,20.086
CSI2_D0_P: J5.21 J10.19 | length 18.5
  Layer1 Top w0.125: J5.21@40.25,12 40.461,12 40.586,12.125 40.832,12.125 42.207,10.75 47.704,10.75 48.65,11.696 48.65,16.75 50.15,18.25 50.15,18.7 v1(50.35,18.9)
  Layer4 Bottom w0.125: v1@50.25,18.922 J10.19@50.25,20.086
CSI2_D1_N: J5.17 J10.33 | length 18.4
  Layer1 Top w0.125: J5.17@40.25,14 40.461,14 40.586,13.875 41.454,13.875 47.425,13.875 47.55,14 47.55,14.9 47.45,15 45.1,15 44.8,15.3 44.8,16.6 45.087,16.887 45.5,16.887 45.912,17.3 46.15,17.3 46.563,16.887 46.738,16.887 46.9,17.05 46.9,17.65 v1(46.65,17.9)
  Layer4 Bottom w0.125: v1(46.65,17.9) 46.875,18.125 46.875,19.35 46.75,19.475 J10.33@46.75,20.086
CSI2_D1_P: J5.18 J10.31 | length 18.5
  Layer1 Top w0.125: J5.18@40.25,13.5 40.461,13.5 40.586,13.625 41.558,13.625 47.529,13.625 47.8,13.896 47.8,15.004 47.554,15.25 45.204,15.25 45.05,15.404 45.05,16.496 45.191,16.637 46.841,16.637 47.15,16.946 47.15,17.7 v1(47.35,17.9)
  Layer4 Bottom w0.125: J10.31@47.25,20.086 47.25,19.475 47.125,19.35 47.125,18.125 v1(47.35,17.9)
CSI3_CLK_N: J10.28
CSI3_CLK_P: J10.26
CSI3_D0_N: J5.11 J10.22 | length 18.5
  Layer1 Top w0.125: v1(38.9,15.05) 38.7,15.25 38.7,16.479 39.096,16.875 39.914,16.875 40.039,17 J5.11@40.25,17
  Layer4 Bottom w0.125: v1(38.9,15.05) 39.1,15.25 41.3,15.25 42.15,16.1 42.5,16.1 43.35,15.25 43.9,15.25 44.8,16.15 46.65,16.15 47.104,15.696 47.104,15.446 47.6,14.95 48.554,14.95 49.554,15.95 49.75,15.95 49.875,15.825 49.875,14.65 49.75,14.525 J10.22@49.75,13.914